# Altium PCB A6_dianshe2_lijiahan_dianluban.PcbDoc
Units mil, origin at the board's own origin, x right, y up, seen from the top; angles counter-clockwise.
Board outline 6000 x 4000 mil, 2 copper layers (Top Layer, Bottom Layer); 12 components, 20 nets, 96 pads, 4 vias.
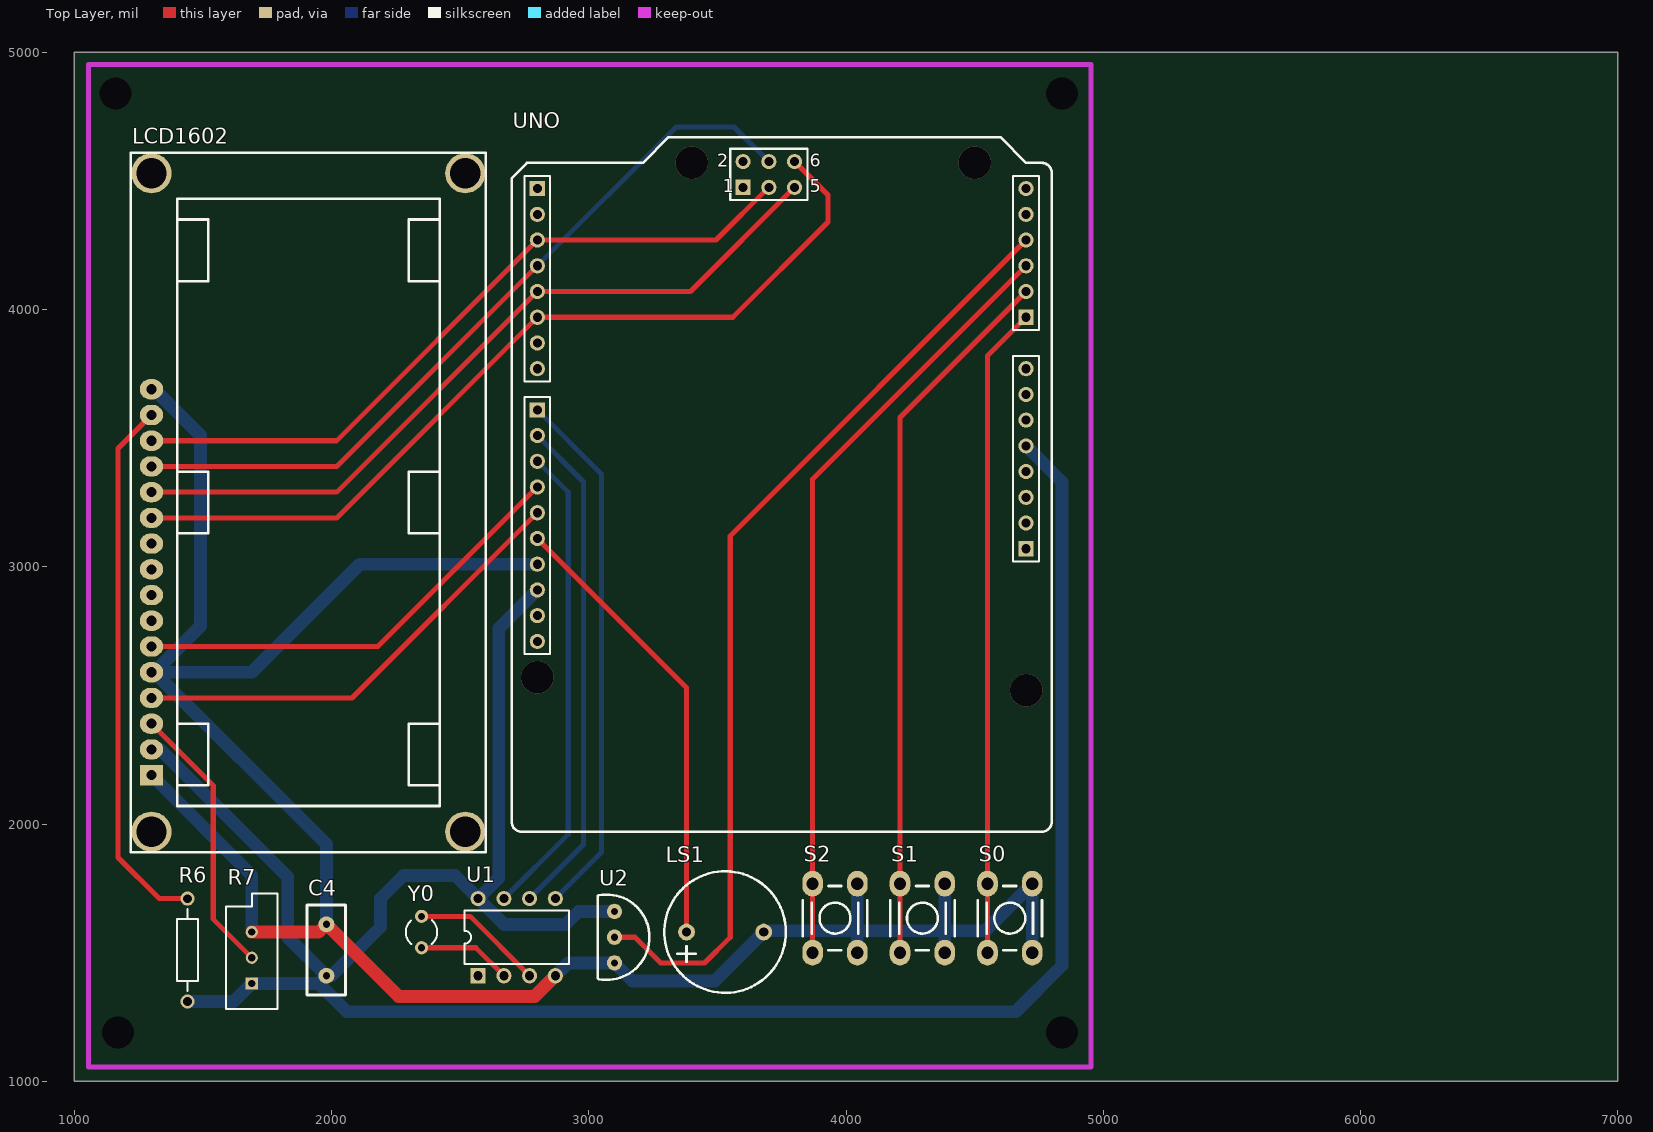
[diagram p0: Top Layer view]
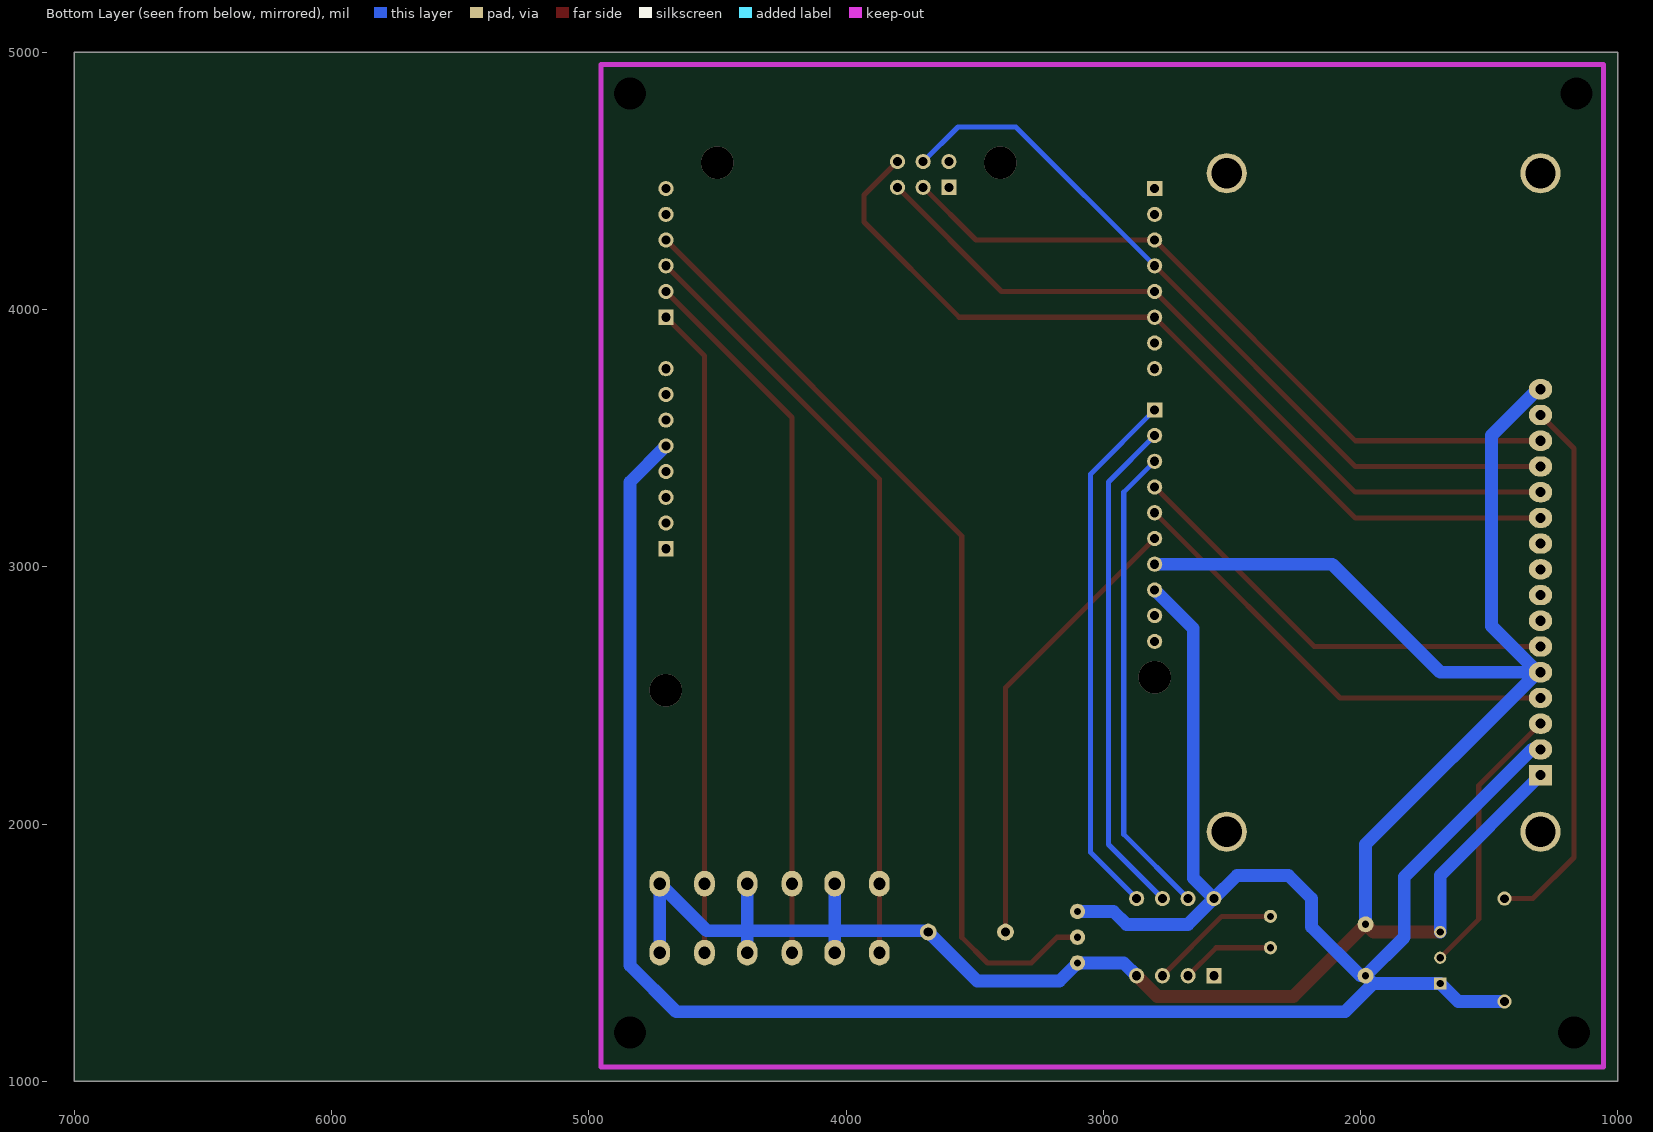
[diagram p1: Bottom Layer view, seen from below]

## Layer stack, top to bottom
Top Layer: signal copper 1.4
Dielectric: dielectric 12.6, FR-4, Dk 4.8
Bottom Layer: signal copper 1.4

## Board outline
1000,1000 7000,1000 7000,5000 1000,5000

## Design rules (kind name [scope] priority, off if disabled: settings)
Clearance [All] p1: gap=10
PolygonConnect [All] p1: connectstyle=Relief reliefconductorwidth=10 reliefentries=4 polygonreliefangle="90 Angle"
RoutingVias [All] p1: holewidth=28 width=50 viastyle="Through Hole" minholewidth=28 minwidth=50 maxholewidth=28 maxwidth=50
SilkscreenOverComponentPads [All] p1: minsilkscreentomaskgap=10
SolderMaskExpansion [All] p1: expansion=4
TestPointUsage [All] p1: valid=0 allowmultiple=FALSE
Testpoint [All] p1: side=15 testpointundercomponent=TRUE minsize=40 maxsize=100 preferedsize=60 minholesize=0 maxholesize=40 preferedholesize=32 testpointgrid=1 style=1023 order=0123456789
Width [All] p1: maxlimit=50 minlimit=10 preferedwidth=10 toplayer_prefwidth=20 bottomlayer_prefwidth=20 minimp=50.000000 maximp=50.000000 favimp=50.000000
23 further rules are at their usual default settings.

## Components (designator, comment, footprint, x,y, rotation, side; value= is the part's Value field where it differs from the comment)
C4 "Cap" RAD0.2 1980,1610 r270 top
LCD1602 "LCD1602" LCD1602 1300,2190 r90 top
LS1 "Buzzer" Buzzer 3380,1580 r0 top
R6 "Res2" AXIAL-0.4 1440,1510 r270 top
R7 "RPot" VR5 1690,1480 r90 top
S0 "SW-PB" AN-S 4550,1500 r90 top
S1 "SW-PB" AN-S 4210,1500 r90 top
S2 "SW-PB" AN-S 3870,1500 r90 top
U1 "DS1302" DIP8 2720,1560 r0 top
U2 "LM35" LM35 3100,1660 r0 top
UNO "Arduino" Arduino-UNO 3750,3610 r90 top
Y0 "XTAL" R38 2350,1580 r0 top

## Footprints (in the part's own frame and the unit in brackets; to place one, negate y for a bottom-side part, rotate by r counter-clockwise, add the part's x,y. Pads: shape width x height; smd on the part's side, far side on the other; paste and mask are expansions set on the pad)
AN-S [mil] "小按钮开关"
  oval 100x80 hole 48: 1(0,0) 1(268,0) 2(0,-174) 2(268,-174)
  silkscreen extent 9,-212 259,38
Arduino-UNO [mm] "Arduino板"
  rect 1.5x1.5 hole 0.9: 1(21.844,24.13) 1(21.971,3.81) 9(0,24.13) 19(-13.716,-24.13) 27(9.144,-24.13)
  round 1.5 hole 0.9: 2(19.304,24.13) 2(24.511,3.81) 3(16.764,24.13) 3(21.971,1.27) 4(14.224,24.13) 4(24.511,1.27) 5(11.684,24.13) 5(21.971,-1.27) 6(9.144,24.13) 6(24.511,-1.27) 7(6.604,24.13) 8(4.064,24.13) 10(-2.54,24.13) 11(-5.08,24.13) 12(-7.62,24.13) 13(-10.16,24.13) 14(-12.7,24.13) 15(-15.24,24.13) 16(-17.78,24.13) 17(-20.32,24.13) 18(-22.86,24.13) 20(-11.176,-24.13) 21(-8.636,-24.13) 22(-6.096,-24.13) 23(-3.556,-24.13) 24(-1.016,-24.13) 25(1.524,-24.13) 26(4.064,-24.13) 28(11.684,-24.13) 29(14.224,-24.13) 30(16.764,-24.13) 31(19.304,-24.13) 32(21.844,-24.13)
  silkscreen extent -41.66,-26.67 26.92,26.67
AXIAL-0.4 [mm] "Resistor; 2 Leads"
  round 1.4 hole 0.85: 1(-5.08,0) 2(5.08,0)
  silkscreen extent -4.06,-1.02 4.06,1.02
Buzzer [mil] "蜂鸣器"
  round 65 hole 36: 1(0,0) 2(300,0)
  silkscreen extent -86,-236 386,236
DIP8 [mm] "DIP; 8 Leads; Row Spacing 7.62 mm; Pitch 2.54 mm"
  rect 1.5x1.5 hole 0.9: 1(-3.81,-3.81)
  round 1.5 hole 0.9: 2(-1.27,-3.81) 3(1.27,-3.81) 4(3.81,-3.81) 5(3.81,3.81) 6(1.27,3.81) 7(-1.27,3.81) 8(-3.81,3.81)
  silkscreen extent -5.15,-2.65 5.15,2.65
LCD1602 [mm] "1602液晶屏"
  round 3.962 hole 3: 0(-5.588,0) 0(-5.588,-30.988) 0(59.436,-30.988) 0(59.436,0)
  rect 2x2.3 hole 1: 1(0,0)
  oval 2x2.3 hole 1: 2(2.54,0) 3(5.08,0) 4(7.62,0) 5(10.16,0) 6(12.7,0) 7(15.24,0) 8(17.78,0) 9(20.32,0) 10(22.86,0) 11(25.4,0) 12(27.94,0) 13(30.48,0) 14(33.02,0) 15(35.56,0) 16(38.1,0)
  silkscreen extent -7.62,-33.02 61.47,2.03
LM35 [mil]
  round 60 hole 28: 1(0,0) 2(0,-100) 3(0,-200)
  silkscreen extent -65,-266 136,66
R38 [mm] "Crystal, Thru-Hole; 2 Leads; Body 3.1 x 8.2 mm (Dia.xH)"
  round 1.3 hole 0.7: 1(0,1.55) 2(0,-1.55)
  silkscreen extent -1.55,-1.19 1.55,1.17
RAD0.2 [mil]
  round 62 hole 28: 1(0,0) 2(200,0)
  silkscreen extent -75,-75 275,75
VR5 [mm] "Potentiometer; 3 Leads"
  rect 1.2x1.2 hole 0.7: 1(-2.54,0)
  round 1.2 hole 0.7: 2(0,0) 3(2.54,0)
  silkscreen extent -5.08,-2.54 6.35,2.54

## Part data
C4: "Capacitor"
LCD1602: "液晶屏"
LS1: "Magnetic Transducer Buzzer"
R6: "Resistor"
R7: "Potentiometer"
S0 S1 S2: "Switch"
U1: "Trickle Charge Timekeeping Chip"
U2: "LM35温度传感器"
UNO: library part Arduino-UNO
Y0: "Crystal Oscillator"

## Free pads (board coordinates)
  round 60 hole 125: 0(1160,4840) 1(4840,4840) 2(4840,1190) 3(1170,1190)

## Via types
v1: diameter 125.98, hole 125.98, Top Layer to Bottom Layer, 4 vias

## Nets (pads, with @x,y where several pads share a name; then routed paths per layer and width w, separated by ;. In a path a pad name is that pad's centre, name@x,y a point inside that pad or via, vN(x,y) a via of type N, cw(c..) or ccw(c..) an arc to the next point about the centre after c; other vN are vias at no path point)
5V: C4.2 LCD1602.2 R6.2 R7.1 U1.8 U2.1 UNO.16 UNO.23 | length 9591.9
  Bottom Layer w50: LCD1602.2 1334.14,2290 1830,1794.14 1830,1560 C4.2 ; R6.2 1620,1310 R7.1 1950,1380 ; UNO.16 2650,2760 2650,1790 U1.8 ; U2.1 2960,1660 2910,1610 2670,1610 U1.8 ; UNO.23 4840,3330 4840,1450 4660,1270 2060,1270 1950,1380 ; 1950,1380 C4.2 ; C4.2 2000,1410 2190,1600 2190,1710 2280,1800 2480,1800 U1.8
GND: C4.1 LCD1602.1 LCD1602.5 LCD1602.16 LS1.2 R7.3 S0.2 S1.2 S2.2 U1.4 U2.3 UNO.15 | length 9198.9
  Top Layer w50: R7.3 1950,1580 C4.1 2260,1330 2790,1330 U1.4
  Bottom Layer w50: LCD1602.1 1690,1800 R7.3 ; LCD1602.16 1311.08,3690 1490,3511.08 1490,2768.92 LCD1602.5@1311.08,2590 ; C4.1 1980,1921.08 LCD1602.5@1311.08,2590 ; UNO.15 2110,3010 1690,2590 LCD1602.5@1311.08,2590 ; U1.4 2920,1460 U2.3 3170,1390 3490,1390 LS1.2 3685,1585 4541,1585 4724,1768 S0.2@4724,1500 ; S2.2@4044,1500 4044,1571 4030,1585 4044,1599 S2.2@4044,1768 ; S1.2@4384,1500 4384,1591 ; S1.2@4384,1768 4384,1591 ; 4390,1585 4384,1591 ; LCD1602.5@1311.08,2590 LCD1602.5 LCD1602.5@1311.08,2590
NetLCD1602_3: LCD1602.3 R7.2 | length 1071.5
  Top Layer w20: LCD1602.3 1540,2150 1540,1630 R7.2
NetLCD1602_4: LCD1602.4 UNO.13 | length 1798.2
  Top Layer w20: LCD1602.4 2080,2490 UNO.13
NetLCD1602_6: LCD1602.6 UNO.12 | length 1756.8
  Top Layer w20: LCD1602.6 2180,2690 UNO.12
NetLCD1602_11: LCD1602.11 UNO.6 | length 3395.2
  Top Layer w20: LCD1602.11 2020,3190 2800,3970 3560,3970 3930,4340 3930,4445 UNO.6@3800,4575
NetLCD1602_12: LCD1602.12 UNO.5 | length 2990.8
  Top Layer w20: LCD1602.12 2020,3290 2800,4070 3395,4070 UNO.5@3800,4475
NetLCD1602_13: LCD1602.13 UNO.4 | length 3002.7
  Top Layer w20: LCD1602.13 2020,3390 UNO.4@2800,4170
  Bottom Layer w20: UNO.4@2800,4170 3340,4710 3565,4710 UNO.4@3700,4575
NetLCD1602_14: LCD1602.14 UNO.3 | length 2808
  Top Layer w20: LCD1602.14 2020,3490 2800,4270 3495,4270 UNO.3@3700,4475
NetLCD1602_15: LCD1602.15 R6.1 | length 2110.1
  Top Layer w20: LCD1602.15 1170,3460 1170,1870 1330,1710 R6.1
NetLS1_1: LS1.1 UNO.14 | length 1770.2
  Top Layer w20: UNO.14 3380,2530 LS1.1
NetS0_1: S0.1 UNO.27 | length 2532.1
  Top Layer w20: S0.1@4550,1500 4550,1768 4550,3820 UNO.27
NetS1_1: S1.1 UNO.28 | length 2773
  Top Layer w20: S1.1@4210,1500 4210,1768 4210,3580 UNO.28
NetS2_1: S2.1 UNO.29 | length 3013.8
  Top Layer w20: S2.1@3870,1500 3870,1768 3870,3340 UNO.29
NetU1_2: U1.2 Y0.2 | length 365.1
  Top Layer w20: Y0.2 2561.02,1518.98 U1.2
NetU1_3: U1.3 Y0.1 | length 515.7
  Top Layer w20: Y0.1 2538.98,1641.02 U1.3
NetU1_5: U1.5 UNO.9 | length 2078.1
  Bottom Layer w20: UNO.9 3050,3360 3050,1890 U1.5
NetU1_6: U1.6 UNO.10 | length 1961.5
  Bottom Layer w20: U1.6 2980,1920 2980,3330 UNO.10
NetU1_7: U1.7 UNO.11 | length 1853.3
  Bottom Layer w20: U1.7 2920,1960 2920,3290 UNO.11
NetU2_2: U2.2 UNO.30 | length 3719.2
  Top Layer w20: U2.2 3180,1560 3280,1460 3450,1460 3550,1560 3550,3120 UNO.30
pads on no net: LCD1602.0 LCD1602.7 LCD1602.8 LCD1602.9 LCD1602.10 U1.1 UNO.1 UNO.2 UNO.7 UNO.8 UNO.17 UNO.18 UNO.19 UNO.20 UNO.21 UNO.22 UNO.24 UNO.25 UNO.26 UNO.31 UNO.32
copper on no net:
  other v1: 4700,2520 2800,2570 3400,4570 4500,4570

## Keep-outs
Keep-Out Layer:
  lines w20: 1055,1055 4952.64,1055 4952.64,4952.64 1055,4952.64 1055,1055

## Text inside footprints (layer, text, board x,y; h text height)
UNO: Top Overlay "6" at 3860,4555 h50; Top Overlay "5" at 3860,4455 h50; Top Overlay "2" at 3500,4555 h50; Top Overlay "1" at 3520,4455 h50